# Altium PCB 编码器v5.0.PcbDoc
Units mm, origin at the board's own origin, x right, y up, seen from the top; angles counter-clockwise.
Board outline 74.17 x 43.39 mm, 2 copper layers (Top Layer, Bottom Layer); 85 components, 81 nets, 300 pads, 329 vias.
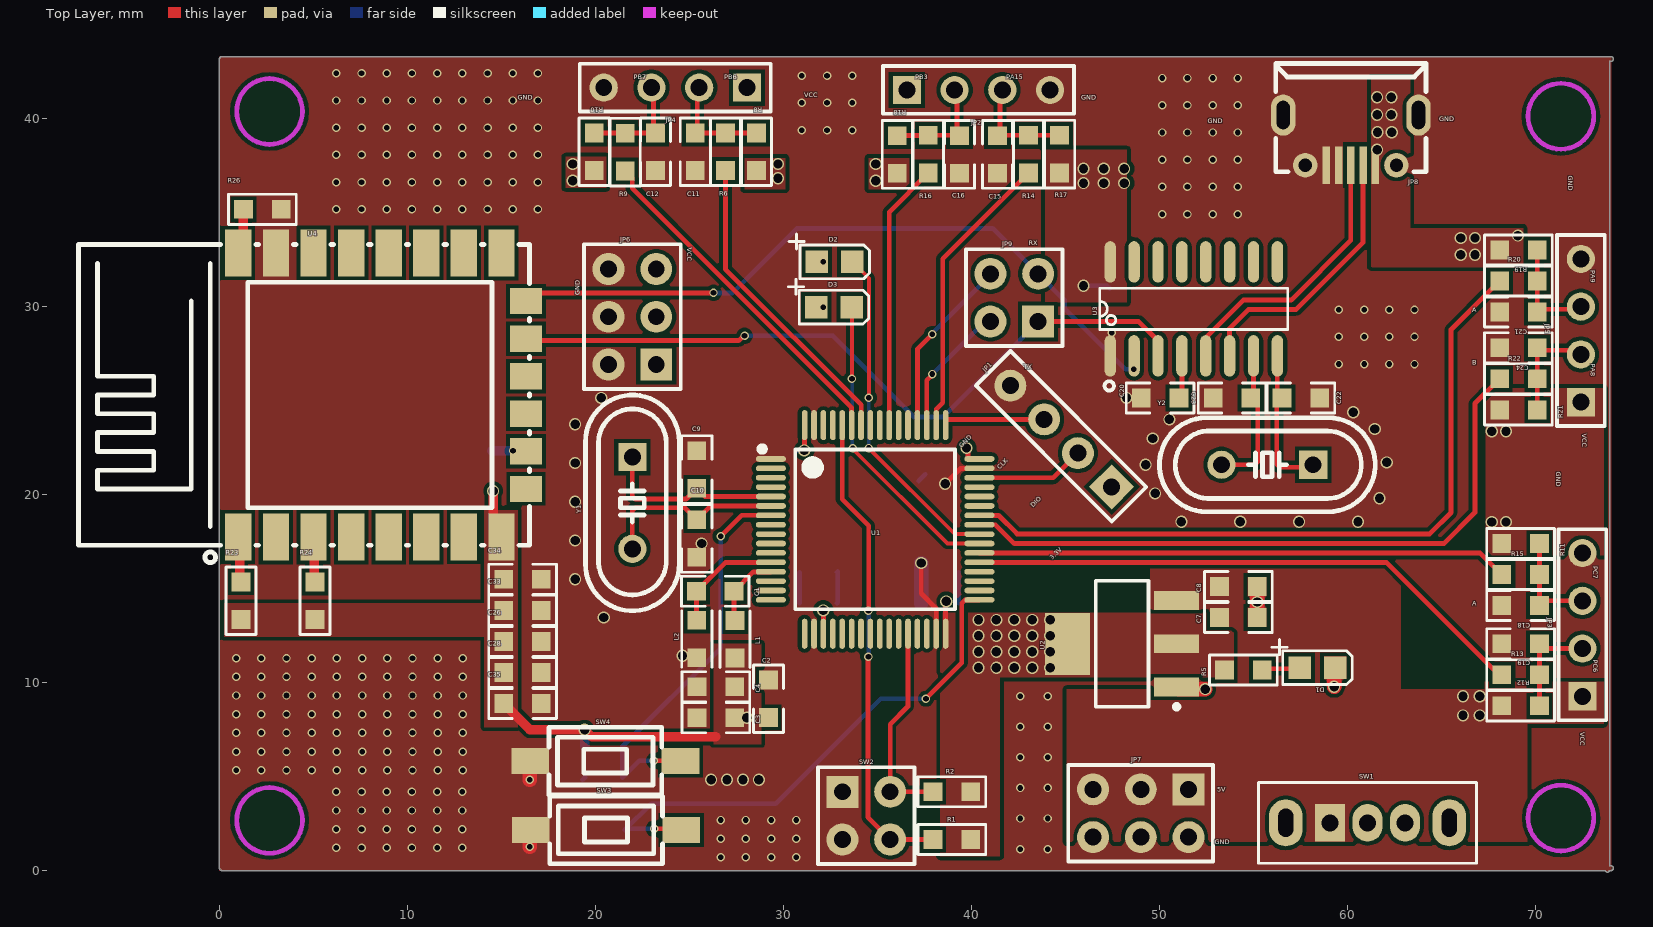
[diagram p0: Top Layer view]
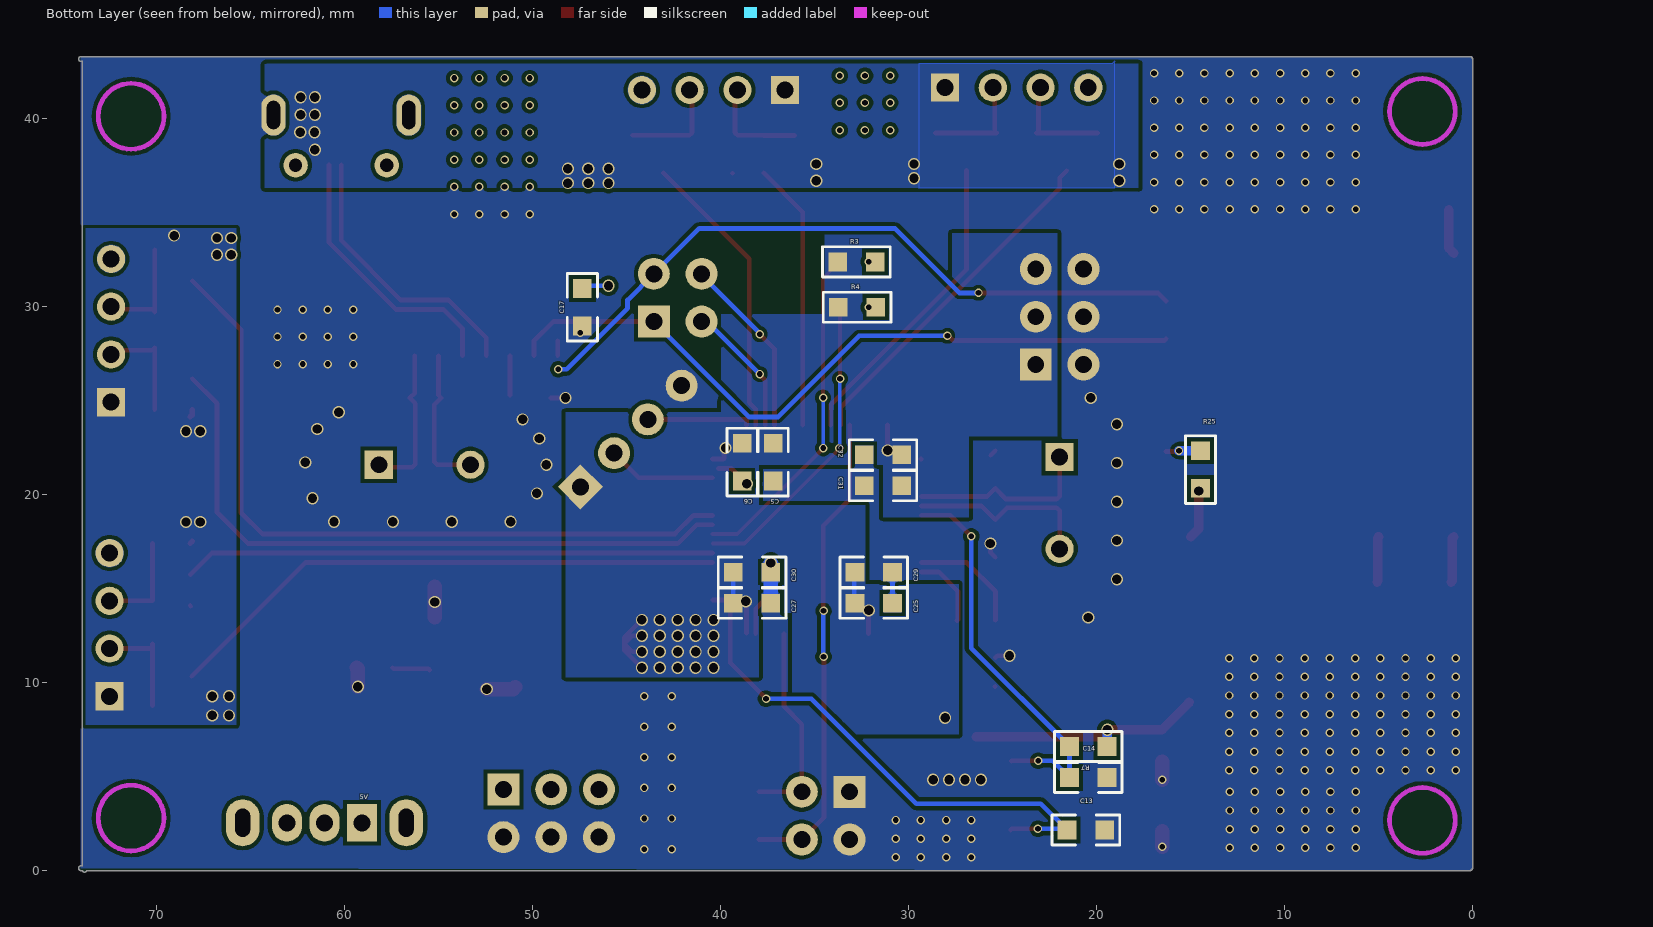
[diagram p1: Bottom Layer view, seen from below]

## Layer stack, top to bottom
Top Solder: solder mask 0.0102, Solder Resist, Dk 3.5
Top Layer: signal copper 0.0356
Dielectric 1: dielectric 0.32, FR-4, Dk 4.8
Bottom Layer: signal copper 0.0356
Bottom Solder: solder mask 0.0102, Solder Resist, Dk 3.5

## Board outline
0,0.127 ccw(c0.127,0.127) 0.127,0 73.728,0 ccw(c73.848,0.043) 73.968,0 74.041,0 ccw(c74.041,0.127) 74.168,0.127 ccw(c74.041,0.127) 74.041,0.255 73.975,0.255 73.975,43.053 74.041,43.053 ccw(c74.041,43.18) 74.168,43.18 ccw(c74.041,43.18) 74.041,43.308 0.127,43.308 ccw(c0.127,43.18) 0,43.18

## Design rules (kind name [scope] priority, off if disabled: settings)
Clearance Clearance_2 [InNetClass('PWR')] p1: gap=0.203 ignorepadtopadclearanceinfootprint=TRUE
Clearance Clearance_1 [InNetClass('GND')] p2: gap=0.203 ignorepadtopadclearanceinfootprint=TRUE
Clearance Clearance_3 [InNetClass('SIGNAL')] p3: gap=0.203 ignorepadtopadclearanceinfootprint=TRUE
Clearance [All] p4: gap=0.203 ignorepadtopadclearanceinfootprint=TRUE
DiffPairsRouting [All] p1: maxlimit=0.3 minlimit=0.203 mostfreqgap=0.254 toplayer_minwidth=0.203 toplayer_maxwidth=0.254 toplayer_prefwidth=0.254 bottomlayer_minwidth=0.203 bottomlayer_maxwidth=0.254 bottomlayer_prefwidth=0.254 maxuncoupledlength=12.7
PolygonConnect [All] p1: connectstyle=Direct reliefconductorwidth=0.254 reliefentries=4 polygonreliefangle="90 Angle" airgapwidth=0.254
RoutingVias [All] p1: holewidth=0.711 width=1.27 viastyle="Through Hole" minholewidth=0.711 minwidth=1.27 maxholewidth=0.711 maxwidth=1.27
SolderMaskExpansion [All] p1: expansion=0.102 istentingtop=FALSE
Width [All] p1: maxlimit=2.54 minlimit=0.203 preferedwidth=0.254
29 further rules are at their usual default settings.

## Classes and differential pairs
net class SIGNAL: BOOT0 BOOT1 CH340_D+ CH340_D- NetC9_1 NetC10_1 NetC11_2 NetC12_2 NetC15_2 NetC16_1 NetC18_1 NetC19_1 NetC20_1 NetC21_1 NetC22_1 NetC23_1 NetC24_1 NetD1_1 NetD2_1 NetD3_1 NetF1_2 NetR23_2 NetR24_2 NetR25_1 NetR26_1 PA0 PA1 PA2 PA3 PA4 PA5 PA6 PA7 PA8 PA9 PA10 PA11 PA12 PA15 PB0 PB1 PB3 PB4 PB5 PB6 PB7 PB8 PB9 PB10 PB11 PB12 PB13 PB14 PB15 PC0 PC1 PC2 PC3 PC4 PC5 PC6 PC7 PC8 PC9 PC10 PC11 PC12 PC13 PC14 PC15 PD2 RESET RX SWCLK SWDIO TX VDDA VSSA
net class GND: GND
net class PWR: 3.3V 5V

## Components (designator, comment, footprint, x,y, rotation, side; value= is the part's Value field where it differs from the comment)
C1 "0805c" 0805C 26.384,14.859 r180 top
C2 "0805c" 0805C 29.21,9.144 r90 top
C3 "0805c" 0805C 26.416,8.128 r180 top
C4 "0805c" 0805C 26.416,9.779 r180 top
C5 "0805c" 0805C 37.211,21.733 r90 bottom
C6 "0805c" 0805C 38.862,21.733 r90 bottom
C7 "0805c" 0805C 54.213,13.462 r0 top
C8 "0805c" 0805C 54.213,15.113 r0 top
C9 "22pF" 0805C 25.4,21.336 r90 top
C10 "22pF" 0805C 25.4,17.669 r270 top
C11 "10nF" 0805C 25.315,38.243 r90 top
C12 "10nF" 0805C 23.199,38.243 r90 top
C13 "0805c" 0805C 20.574,2.159 r180 bottom
C14 "0805c" 0805C 20.447,4.953 r180 bottom
C15 "10nF" 0805C 41.402,38.1 r90 top
C16 "10nF" 0805C 39.37,38.1 r270 top
C17 "0805c" 0805C 47.366,29.972 r90 bottom
C18 "10nF (103) 10% 50V" 0805C 69.231,14.097 r180 top
C19 "10nF (103) 10% 50V" 0805C 69.231,12.065 r180 top
C20 "0805c" 0805C 50.049,25.146 r180 top
C21 "10nF" 0805C 69.115,29.718 r180 top
C22 "0805c" 0805C 57.542,25.146 r0 top
C23 "0805c" 0805C 53.875,25.146 r180 top
C24 "10nF" 0805C 69.115,27.813 r180 top
C25 "0805c" 0805C 31.861,14.224 r0 bottom
C26 "0805c" 0805C 16.129,12.192 r0 top
C27 "0805c" 0805C 38.338,14.224 r0 bottom
C28 "0805c" 0805C 16.129,10.541 r0 top
C29 "0805c" 0805C 31.861,15.875 r0 bottom
C30 "0805c" 0805C 38.338,15.875 r0 bottom
C31 "0805c" 0805C 31.369,20.474 r180 bottom
C32 "0805c" 0805C 31.369,22.125 r180 bottom
C33 "0805c" 0805C 16.129,13.843 r0 top
C34 "10uF (106) 10% 25V" 0805C 16.129,15.494 r180 top
C35 "100nF(104) 10% 50V" 0805C 16.129,8.89 r180 top
D1 "LED" 0805D 58.42,10.795 r0 top
D2 "LED" 0805D 32.732,32.385 r0 top
D3 "LED" 0805D 32.7,29.972 r0 top
JP1 "SWD" SWD 44.779,23.105 r135 top
JP2 "PIN4" HDR1X4 36.576,41.529 r0 top
JP3 "PIN4" HDR1X4 72.517,9.271 r90 top
JP4 "PIN4" HDR1X4 28.067,41.656 r180 top
JP5 "PIN4" HDR1X4 72.436,24.919 r90 top
JP6 "PWR3.3V" PWR 23.241,26.924 r90 top
JP7 "PWR5V" PWR 51.562,4.318 r180 top
JP8 "microusb" MICRO-USB-SMD_MICROXNJ 60.198,38.862 r180 top
JP9 "2*2" CON20VP2R54-2X2TM 42.291,30.48 r90 top
L1 "0805L" 0805L 27.432,12.303 r90 top
L2 "0805L" 0805L 25.4,12.319 r90 top
R1 "0805r" 0805R 38.973,1.651 r180 top
R2 "0805r" 0805R 38.973,4.191 r180 top
R3 "0805r" 0805R 32.782,32.385 r180 bottom
R4 "0805r" 0805R 32.75,29.972 r180 bottom
R5 "0805r" 0805R 54.483,10.668 r180 top
R6 "10KΩ" 0805R 26.924,38.243 r270 top
R7 "0805r" 0805R 20.447,6.604 r180 bottom
R8 "10KΩ" 0805R 28.575,38.243 r90 top
R9 "10KΩ" 0805R 21.59,38.227 r270 top
R10 "10KΩ" 0805R 19.939,38.243 r90 top
R11 "10KΩ" 0805R 69.231,17.399 r0 top
R12 "10KΩ" 0805R 69.231,8.763 r180 top
R13 "10KΩ" 0805R 69.231,10.414 r0 top
R14 "10KΩ" 0805R 43.053,38.116 r270 top
R15 "10KΩ" 0805R 69.231,15.748 r0 top
R16 "10KΩ" 0805R 37.719,38.116 r270 top
R17 "10KΩ" 0805R 44.704,38.116 r270 top
R18 "10KΩ" 0805R 36.068,38.1 r90 top
R19 "10KΩ" 0805R 69.115,33.02 r0 top
R20 "10KΩ" 0805R 69.115,31.369 r180 top
R21 "10KΩ" 0805R 69.115,24.511 r0 top
R22 "10KΩ" 0805R 69.115,26.162 r180 top
R23 "0805r" 0805R 1.143,14.351 r90 top
R24 "0805r" 0805R 5.08,14.351 r90 top
R25 "0805r" 0805R 14.478,21.336 r270 bottom
R26 "0805r" 0805R 2.286,35.179 r0 top
SW1 "SWTICH_3P" SWITCH_3P 59.087,2.54 r0 top
SW2 "SW_BOOT" CON20VP2R54-2X2TM 34.417,2.921 r270 top
SW3 "KEY" SW-SMD_L6.1-W3.6-LS8.0 20.574,2.159 r180 top
SW4 "KEY" SW-SMD_L6.1-W3.6-LS8.0 20.532,5.823 r180 top
U1 "STM32F103RCT6" PCBComponent_1 30.648,22.34 r270 top
U2 "ASM1117-3.3" SOT223_N 48.027,12.065 r180 top
U3 "CH340G" SOP16 51.843,29.885 r0 top
U4 "" WIFIM-SMD_ESP-12F-ESP8266MOD 8.658,25.303 r0 top
Y1 "8MHz" HC-49US_L11.5-W4.5-P4.88 21.971,19.558 r270 top
Y2 "12MHz" HC-49US_L11.5-W4.5-P4.88 55.753,21.59 r180 top

## Footprints (in the part's own frame and the unit in brackets; to place one, negate y for a bottom-side part, rotate by r counter-clockwise, add the part's x,y. Pads: shape width x height; smd on the part's side, far side on the other; paste and mask are expansions set on the pad)
0805C [mm]
  rect 1x1 smd: 1(-1,0) 2(1,0)
  silkscreen extent -1.8,-0.8 1.8,0.8
0805D [mm]
  rect 1.2x1.2 smd: 1(-0.95,0) 2(0.95,0)
  silkscreen extent -2.42,-0.9 1.85,1.49
0805L [mm]
  rect 1x1 smd: 1(-1,0) 2(1,0)
  silkscreen extent -1.5,-0.8 1.5,0.8
0805R [mm]
  rect 1x1 smd: 1(-1,0) 2(1,0)
  silkscreen extent -1.8,-0.8 1.8,0.8
CON20VP2R54-2X2TM [mm]
  rect 1.7x1.7 hole 0.9: 1(-1.27,-1.27)
  round 1.7 hole 0.9: 2(-1.27,1.27) 3(1.27,-1.27) 4(1.27,1.27)
  silkscreen extent -2.57,-2.57 2.57,2.57
HC-49US_L11.5-W4.5-P4.88 [mm]
  rect 1.5x1.5 hole 0.9: 1(-2.44,0)
  round 1.5 hole 0.9: 2(2.44,0)
  silkscreen extent -5.74,-2.5 5.74,2.5
HDR1X4 [mm] "Connector; Header; 4 Position"
  rect 1.5x1.5 hole 0.9: 1(0,0)
  round 1.5 hole 0.9: 2(2.54,0) 3(5.08,0) 4(7.62,0)
  silkscreen extent -1.27,-1.27 8.89,1.27
MICRO-USB-SMD_MICROXNJ [mm]
  rect 0.4x2 smd: 1(-1.3,1.327) 2(-0.65,1.327) 3(0,1.327) 4(0.65,1.327) 5(1.3,1.327)
  round 1.3 hole 0.7: 6(2.425,1.335) 9(-2.425,1.335)
  oval 1.3x2.2 hole 0.7 slot 1.5 at 90 deg: 7(3.6,-1.335) 8(-3.6,-1.335)
  silkscreen extent -4,-4.07 4,1.68
PCBComponent_1 [mm]
  oval 0.3x1.6 smd: 1(0.441,-1.311) 2(0.941,-1.311) 3(1.441,-1.311) 4(1.941,-1.311) 5(2.441,-1.311) 6(2.941,-1.311) 7(3.441,-1.311) 8(3.941,-1.311) 9(4.441,-1.311) 10(4.941,-1.311) 11(5.441,-1.311) 12(5.941,-1.311) 13(6.441,-1.311) 14(6.941,-1.311) 15(7.441,-1.311) 16(7.941,-1.311) 33(7.941,9.789) 34(7.441,9.789) 35(6.941,9.789) 36(6.441,9.789) 37(5.941,9.789) 38(5.441,9.789) 39(4.941,9.789) 40(4.441,9.789) 41(3.941,9.789) 42(3.441,9.789) 43(2.941,9.789) 44(2.441,9.789) 45(1.941,9.789) 46(1.441,9.789) 47(0.941,9.789) 48(0.441,9.789)
  oval 1.6x0.3 smd: 17(9.741,0.489) 18(9.741,0.989) 19(9.741,1.489) 20(9.741,1.989) 21(9.741,2.489) 22(9.741,2.989) 23(9.741,3.489) 24(9.741,3.989) 25(9.741,4.489) 26(9.741,4.989) 27(9.741,5.489) 28(9.741,5.989) 29(9.741,6.489) 30(9.741,6.989) 31(9.741,7.489) 32(9.741,7.989) 49(-1.359,7.989) 50(-1.359,7.489) 51(-1.359,6.989) 52(-1.359,6.489) 53(-1.359,5.989) 54(-1.359,5.489) 55(-1.359,4.989) 56(-1.359,4.489) 57(-1.359,3.989) 58(-1.359,3.489) 59(-1.359,2.989) 60(-1.359,2.489) 61(-1.359,1.989) 62(-1.359,1.489) 63(-1.359,0.989) 64(-1.359,0.489)
  silkscreen extent -0.24,-1.92 8.44,8.49
PWR [mm]
  rect 1.7x1.7 hole 0.9: 1(0,0)
  round 1.7 hole 0.9: 2(0,2.54) 3(2.54,0) 4(2.54,2.54) 5(5.08,0) 6(5.08,2.54)
  silkscreen extent -1.3,-1.3 6.4,3.84
SOP16 [mm]
  oval 0.6x2.2 smd: 1(-4.445,-2.5) 2(-3.175,-2.5) 3(-1.905,-2.5) 4(-0.635,-2.5) 5(0.635,-2.5) 6(1.905,-2.5) 7(3.175,-2.5) 8(4.445,-2.5) 9(4.445,2.5) 10(3.175,2.5) 11(1.905,2.5) 12(0.635,2.5) 13(-0.635,2.5) 14(-1.905,2.5) 15(-3.175,2.5) 16(-4.445,2.5)
  silkscreen extent -5,-4.35 5,1.1
SOT223_N [mm] "SOT223, 4-Leads, Body 6.5x3.5mm, Pitch 2.3mm, Lead Span 7mm, IPC Medium Density"
  rect 2.4x1 smd: 1(-2.9,2.3) 2(-2.9,0) 3(-2.9,-2.3)
  rect 2.4x3.3 smd: 4(2.9,0)
  silkscreen extent -3.03,-3.35 1.4,3.47, body extent -1.85,-3.35 1.85,3.35, height 1.7
SW-SMD_L6.1-W3.6-LS8.0 [mm]
  rect 2x1.38 smd: 1(-4,0) 2(4,0)
  silkscreen extent -3,-1.8 3,1.8
SWD [mm]
  rect 1.7x1.7 hole 0.9: 1(-3.81,0)
  round 1.7 hole 0.9: 2(-1.27,0) 3(1.27,0) 4(3.81,0)
  silkscreen extent -5.11,-1.3 5.11,1.3
SWITCH_3P [mm]
  rect 1.6x2 hole 0.9: 1(0,0)
  oval 1.6x2 hole 0.9: 2(2,0) 3(4,0)
  oval 1.8x2.5 hole 1.5 slot 0.8 at 0 deg: 4(-2.35,0) 4(6.35,0)
  silkscreen extent -3.8,-2.15 7.8,2.15
WIFIM-SMD_ESP-12F-ESP8266MOD [mm]
  rect 1.4x2.5 smd: 1(-7.651,-7.551) 2(-5.651,-7.551) 3(-3.651,-7.551) 4(-1.651,-7.551) 5(0.349,-7.551) 6(2.349,-7.551) 7(4.349,-7.551) 8(6.349,-7.551) 9(6.349,7.549) 10(4.349,7.55) 11(2.349,7.551) 12(0.349,7.551) 13(-1.651,7.55) 14(-3.651,7.551) 15(-5.651,7.55) 16(-7.651,7.551)
  rect 1.7x1.4 smd: 17(7.65,-5) 18(7.649,-3.002) 19(7.649,-1.003) 20(7.649,0.998) 21(7.649,2.997) 22(7.65,4.997)
  silkscreen extent -16.15,-8.92 7.85,8

## Part data
C9 C10: library part "0805 22pF (220) 5% 50V", "贴片电容", Package=0805, SuppliersPartNumber=C1804, ComponentLink1Description=供应商链接, ComponentLink1URL=http://www.szlcsc.com/product/details_2156.html, Supplier=LC
C11 C12 C15 C16 C18 C19 C21 C24: library part "0805 10nF (103) 10% 50V", "贴片电容", Package=0805, SuppliersPartNumber=C1710, ComponentLink1Description=供应商链接, ComponentLink1URL=http://www.szlcsc.com/product/details_2062.html, Supplier=LC
C34: library part "0805 10uF (106) 10% 25V", "贴片电容", Package=0805, SuppliersPartNumber=C15850, ComponentLink1Description=供应商链接, ComponentLink1URL=http://www.szlcsc.com/product/details_16532.html, Supplier=LC
C35: library part "0805 100nF(104) 10% 50V", "贴片电容", Package=0805, SuppliersPartNumber=C49678, ComponentLink1Description=供应商链接, ComponentLink1URL=http://www.szlcsc.com/product/details_50686.html, Supplier=LC
JP8: library part miniusb
R6 R8 R9 R10 R11 R12 R13 R14 R15 R16 R17 R18 R19 R20 R21 R22: library part "0805 10KΩ (1002) 1%", "贴片电阻", Package=0805, SuppliersPartNumber=C17414, ComponentLink1Description=供应商链接, ComponentLink1URL=http://www.szlcsc.com/product/details_18102.html, Supplier=LC
SW3 SW4: library part KEY_4P
U1: "ARM Cortex-M3 32-bit MCU, 256 KB Flash, 48 KB Internal RAM, 51 I/Os, 64-pin LQFP, -40 to 85 degC, Tray", I/Os (High Current)=51, Operating Frequency(F) (Processor speed) (MHz)=72, Supplier Part Number 1=497-9033-ND, Supply Voltage(Vcc) min (V)=2, A/D Converter="3x12-bit (16 Channel)", ComponentLink1Description="Manufacturer URL", ComponentLink1URL=http://www.st.com/web/en/home.html, ComponentLink2Description=Datasheet, ComponentLink2URL=http://www.st.com/st-web-ui/static/active/en/resource/technical/document/datasheet/CD00191185.pdf, ComponentLink3Description="Package Specification", ComponentLink3URL=http://www.st.com/st-web-ui/static/active/en/resource/technical/document/datasheet/DM00037051.pdf, Core="ARM Cortex-M3", D/A Converter="2x12-bit (2 Channel)", DatasheetVersion="Rev. 8", FLASH Size (Prog) (kB)=256, Internal RAM Size (kB)=48, Mounting Technology="Surface Mount", PackageDescription="64-Pin Low Profile Quad Flat Package, 10 x 10 mm Body, 0.5 mm Pitch", PackageReference=LQFP64, PackageVersion="Rev. 4, 06/2013", Packing=Tray, PartNumber=STM32F103RCT6, Supplier 1=Digi-Key, Supplier 2=Newark, Supplier 3=Newark, Supplier 4=Mouser, Supplier Part Number 2=01P4099, Supplier Part Number 3=57P1227, Supplier Part Number 4=511-STM32F103RCT6
U4: library part ESP8266
Y1 Y2: library part "SMD-5032_2P 8MHz 20ppm 20pF", "贴片晶振", Package=SMD-5032_2P, SuppliersPartNumber=C115962, ComponentLink1Description=供应商链接, ComponentLink1URL=http://www.szlcsc.com/product/details_117214.html, Supplier=LC

## Via types
v1: diameter 0.45, hole 0.3, Top Layer to Bottom Layer, 238 vias
v2: diameter 0.65, hole 0.5, Top Layer to Bottom Layer, 91 vias

## Nets (pads, with @x,y where several pads share a name; then routed paths per layer and width w, separated by ;. In a path a pad name is that pad's centre, name@x,y a point inside that pad or via, vN(x,y) a via of type N, cw(c..) or ccw(c..) an arc to the next point about the centre after c; other vN are vias at no path point)
3.3V: C2.1 C3.1 C4.1 C5.2 C6.2 C25.2 C26.1 C27.2 C28.1 C29.2 C30.2 C31.2 C32.2 C33.1 C34.2 C35.2 JP1.1 JP6.1 JP6.3 JP6.5 L1.1 R1.1 R2.1 R3.1 R4.1 R5.2 R7.2 R23.1 R24.1 R25.2 U1.19 U1.32 U1.48 U1.64 U2.2 U2.4 U4.8 | length 30.6
  Top Layer w0.254: v2(31.115,22.352) 31.128,22.365 31.128,23.69 U1.64 ; v2(32.131,13.843) 32.134,13.84 32.134,12.602 U1.19 U1.19@32.146,12.608 ; U1.32@38.628,12.621 38.628,14.279 v2(38.67,14.321) ; v2(39.751,22.479) 39.827,22.403 39.827,21.921 39.848,21.899 U1.48 ; v2(44.196,10.795) 45.127,11.726 U2.4 ; v2(44.196,11.642) 44.703,11.642 U2.4 ; v2(44.196,12.488) 44.704,12.488 U2.4 ; v2(44.196,13.335) 45.127,12.404 U2.4
  Top Layer w0.508: v2(14.561,20.193) 14.561,18.198 U4.8 ; C35.2@15.068,8.951 C35.2 16.526,7.493 v2(19.431,7.493) 19.812,7.112 26.4,7.112
  Bottom Layer w0.254: R25.2 14.561,20.253 v2(14.561,20.193) ; R7.2@19.431,6.62 R7.2 ; C32.2@30.742,22.352 v2(31.115,22.352) ; C25.2 32.893,14.256 32.893,15.907 C29.2 ; v2(38.67,14.321) v2@38.67,14.334 ; C27.2 C30.2
  Bottom Layer w0.508: R7.2@19.431,6.62 v2(19.431,7.493)
  other v2: 28.067,8.128 40.386,10.795 41.338,10.795 42.291,10.795 43.243,10.795 40.386,11.642 41.338,11.642 42.291,11.642 43.243,11.642 40.386,12.488 41.338,12.488 42.291,12.488 43.243,12.488 40.386,13.335 41.338,13.335 42.291,13.335 43.243,13.335
5V: C7.1 C8.1 C17.2 JP2.1 JP3.1 JP4.1 JP5.1 JP7.1 JP7.3 JP7.5 JP8.1 R8.1 R10.1 R11.1 R12.2 R17.2 R18.1 R19.1 R21.1 SW1.1 U2.3 U3.16 | length 2.4
  Top Layer w0.254: v2@61.49,39.094 v2@61.494,39.09 ; v2(67.056,9.271) 67.163,9.271 v2@67.298,9.136
  Top Layer w0.279: R11.1@68.115,17.515 R11.1 ; R21.1 68.115,24.214 68.168,24.214 R21.1@68.231,24.151
  Bottom Layer w0.254: v2(45.974,31.115) 47.223,31.115 C17.2
  other v2: 66.167,8.255 67.056,8.255 66.167,9.271 67.691,18.542 68.453,18.542 67.691,23.368 68.453,23.368 66.04,32.766 66.802,32.766 66.04,33.655 66.802,33.655 69.088,33.782 45.974,36.576 47.053,36.576 48.133,36.576 18.796,36.703 34.925,36.703 29.718,36.83 45.974,37.338 47.053,37.338 48.133,37.338 18.796,37.592 29.718,37.592 34.925,37.592 61.595,38.354 61.617,39.286 62.379,39.286 61.595,40.217 62.357,40.217 61.595,41.148 62.357,41.148
BOOT0: R1.2 SW2.4 U1.60 | length 25.4
  Top Layer w0.254: U1.60 33.137,19.75 34.544,18.343 34.544,13.833 v1(34.533,13.822) ; v1(34.533,11.381) 34.507,11.354 34.507,2.831 SW2.4 R1.2
  Bottom Layer w0.254: v1(34.533,11.381) 34.544,11.391 34.544,13.811 v1@34.555,13.822
BOOT1: R2.2 SW2.2 U1.28 | length 11.1
  Top Layer w0.254: U1.28 36.637,8.735 35.687,7.785 SW2.2 R2.2
CH340_D+: JP8.3 U3.5 | length 14.8
  Top Layer w0.254: U3.5 52.478,28.348 54.483,30.353 57.023,30.353 60.198,33.528 JP8.3
CH340_D-: JP8.2 U3.6 | length 14.6
  Top Layer w0.254: U3.6 53.748,28.856 54.737,29.845 57.277,29.845 60.848,33.416 JP8.2
GND: C2.2 C3.2 C4.2 C5.1 C6.1 C7.2 C8.2 C9.2 C10.2 C11.1 C12.1 C13.2 C14.2 C15.1 C16.2 C17.1 C18.2 C19.2 C20.2 C21.2 C22.2 C23.2 C24.2 C25.1 C26.2 C27.1 C28.2 C29.1 C30.1 C31.1 C32.1 C33.2 C34.1 C35.1 D1.2 JP1.4 JP2.4 JP3.4 JP4.4 JP5.4 JP6.2 JP6.4 JP6.6 JP7.2 JP7.4 JP7.6 JP8.4 JP8.5 JP8.6 JP8.7 JP8.8 JP8.9 L2.1 R26.2 SW2.1 SW2.3 SW3.2 SW4.2 U1.1 U1.18 U1.31 U1.47 U1.63 U2.1 U3.1 U4.15 | length 21
  Top Layer w0.254: SW3.2@16.51,2.095 SW3.2 ; v2(24.638,11.43) 25.289,11.43 L2.1 ; C4.2@25.4,9.795 C4.2 ; C10.2 25.654,16.923 v2(25.654,17.399) ; C9.2 C9.2@25.638,22.098 ; U1.1 U1.1@29.346,21.891 ; SW2.1@32.512,4.826 SW2.1 ; v2(37.338,16.363) 37.338,14.74 38.137,13.941 U1.31 ; v2(38.608,20.574) 39.424,21.39 40.116,21.39 U1.47@40.121,21.395 ; v2(48.26,25.146) C20.2 ; C18.2@68.199,14.065 C18.2
  Top Layer w0.762: v1(16.51,1.27) SW3.2@16.51,2.095 ; v1(16.51,4.826) SW4.2@16.51,5.802 ; U2.1 51.04,9.652 v2(52.451,9.652) ; C7.2 v2(55.213,14.288) C8.2 ; v2(59.309,9.779) 59.309,10.734 D1.2
  Bottom Layer w0.254: C14.2@19.32,4.826 C14.2 ; JP4.4 JP4.4@20.715,41.656 ; C25.1 C29.1 ; C5.1 C5.1@37.56,21.082 ; JP1.4@42.085,25.408 JP1.4
  Bottom Layer w0.762: C27.1 v2(37.338,16.363)
  other v1: 26.67,0.699 28.011,0.699 29.351,0.699 30.692,0.699 42.601,1.143 44.069,1.143 6.223,1.207 7.564,1.207 8.904,1.207 10.245,1.207 11.585,1.207 12.926,1.207 26.67,1.693 28.011,1.693 29.351,1.693 30.692,1.693 6.223,2.201 7.564,2.201 8.904,2.201 10.245,2.201 11.585,2.201 12.926,2.201 26.67,2.688 28.011,2.688 29.351,2.688 30.692,2.688 42.601,2.769 44.069,2.769 6.223,3.196 7.564,3.196 8.904,3.196 10.245,3.196 11.585,3.196 12.926,3.196 6.223,4.191 7.564,4.191 8.904,4.191 10.245,4.191 11.585,4.191 12.926,4.191 42.601,4.394 44.069,4.394 0.889,5.334 2.23,5.334 3.57,5.334 4.911,5.334 6.251,5.334 7.592,5.334 8.932,5.334 10.273,5.334 11.613,5.334 12.954,5.334 42.601,6.02 44.069,6.02 0.889,6.329 2.23,6.329 3.57,6.329 4.911,6.329 6.251,6.329 7.592,6.329 8.932,6.329 10.273,6.329 11.613,6.329 12.954,6.329 0.889,7.324 2.23,7.324 3.57,7.324 4.911,7.324 6.251,7.324 7.592,7.324 8.932,7.324 10.273,7.324 11.613,7.324 12.954,7.324 42.601,7.645 44.069,7.645 0.889,8.318 2.23,8.318 3.57,8.318 4.911,8.318 6.251,8.318 7.592,8.318 8.932,8.318 10.273,8.318 11.613,8.318 12.954,8.318 42.601,9.271 44.069,9.271 0.889,9.313 2.23,9.313 3.57,9.313 4.911,9.313 6.251,9.313 7.592,9.313 8.932,9.313 10.273,9.313 11.613,9.313 12.954,9.313 0.889,10.308 2.23,10.308 3.57,10.308 4.911,10.308 6.251,10.308 7.592,10.308 8.932,10.308 10.273,10.308 11.613,10.308 12.954,10.308 0.889,11.303 2.23,11.303 3.57,11.303 4.911,11.303 6.251,11.303 7.592,11.303 8.932,11.303 10.273,11.303 11.613,11.303 12.954,11.303 59.563,26.949 60.904,26.949 62.244,26.949 63.585,26.949 59.563,28.397 60.904,28.397 62.244,28.397 63.585,28.397 47.475,28.606 59.563,29.845 60.904,29.845 62.244,29.845 63.585,29.845 50.165,34.925 51.506,34.925 52.846,34.925 54.187,34.925 6.223,35.179 7.564,35.179 8.904,35.179 10.245,35.179 11.585,35.179 12.926,35.179 14.266,35.179 15.607,35.179 16.947,35.179 50.165,36.373 51.506,36.373 52.846,36.373 54.187,36.373 6.223,36.627 7.564,36.627 8.904,36.627 10.245,36.627 11.585,36.627 12.926,36.627 14.266,36.627 15.607,36.627 16.947,36.627 50.165,37.821 51.506,37.821 52.846,37.821 54.187,37.821 6.223,38.075 7.564,38.075 8.904,38.075 10.245,38.075 11.585,38.075 12.926,38.075 14.266,38.075 15.607,38.075 16.947,38.075 50.165,39.268 51.506,39.268 52.846,39.268 54.187,39.268 30.988,39.395 32.329,39.395 33.669,39.395 6.223,39.522 7.564,39.522 8.904,39.522 10.245,39.522 11.585,39.522 12.926,39.522 14.266,39.522 15.607,39.522 16.947,39.522 50.165,40.716 51.506,40.716 52.846,40.716 54.187,40.716 30.988,40.843 32.329,40.843 33.669,40.843 6.223,40.97 7.564,40.97 8.904,40.97 10.245,40.97 11.585,40.97 12.926,40.97 14.266,40.97 15.607,40.97 16.947,40.97 50.165,42.164 51.506,42.164 52.846,42.164 54.187,42.164 30.988,42.291 32.329,42.291 33.669,42.291 6.223,42.418 7.564,42.418 8.904,42.418 10.245,42.418 11.585,42.418 12.926,42.418 14.266,42.418 15.607,42.418 16.947,42.418
  other v2: 26.162,4.826 27.009,4.826 27.855,4.826 28.702,4.826 20.447,13.462 18.923,15.494 18.923,17.558 51.181,18.562 54.314,18.562 57.446,18.562 60.579,18.562 18.923,19.622 61.722,19.812 49.784,20.066 49.276,21.59 18.923,21.685 62.103,21.717 49.657,22.987 61.468,23.495 18.923,23.749 50.546,24.003 60.325,24.384 20.32,25.146
NetC9_1: C9.1 U1.5 Y1.1 | length 9.9
  Top Layer w0.254: Y1.1 21.971,19.91 22.12,19.761 24.825,19.761 C9.1 25.837,19.899 U1.5
NetC10_1: C10.1 U1.6 Y1.2 | length 10
  Top Layer w0.254: Y1.2 21.971,19.155 22.12,19.304 24.765,19.304 C10.1 26.13,19.399 U1.6
NetC11_2: C11.2 JP4.2 R6.1 R8.2 | length 5.6
  Top Layer w0.254: C11.2 R8.2 ; C11.2@25.421,39.349 25.421,41.55 JP4.2
NetC12_2: C12.2 JP4.3 R9.1 R10.2 | length 5.6
  Top Layer w0.254: R10.2 21.59,39.243 23.093,39.243 C12.2 ; JP4.3 23.093,41.55 C12.2@23.093,39.349
NetC15_2: C15.2 JP2.3 R14.1 R17.1 | length 5.6
  Top Layer w0.254: JP2.3 41.529,41.402 41.529,39.265 41.678,39.116 R14.1 R17.1
NetC16_1: C16.1 JP2.2 R16.1 R18.2 | length 5.5
  Top Layer w0.254: R18.2@36.076,39.108 R16.1@37.719,39.108 ; R16.1 39.094,39.116 39.243,39.265 39.243,41.402 JP2.2
NetC18_1: C18.1 JP3.3 R11.2 R15.2 | length 5.3
  Top Layer w0.254: R11.2 R15.2 70.231,14.351 JP3.3
NetC19_1: C19.1 JP3.2 R12.1 R13.2 | length 5.8
  Top Layer w0.254: R12.1 R13.2 C19.1@70.231,11.811 ; C19.1 C19.1@70.231,11.811 ; JP3.2@72.39,11.684 JP3.2 C19.1@70.231,11.811
NetC20_1: C20.1 U3.4 | length 2.1
  Top Layer w0.254: C20.1@51.208,25.305 U3.4
NetC21_1: C21.1 JP5.3 R19.2 R20.1 | length 5.7
  Top Layer w0.254: R19.2 R20.1 C21.1 70.255,29.859 72.295,29.859 JP5.3
NetC22_1: C22.1 U3.8 Y2.1 | length 7.9
  Top Layer w0.254: U3.8 56.288,25.4 C22.1 56.261,24.865 56.261,21.612 56.41,21.463 Y2.1@58.093,21.463
NetC23_1: C23.1 U3.7 Y2.2 | length 7.6
  Top Layer w0.254: Y2.2@53.34,21.59 55.096,21.59 55.245,21.739 55.245,24.776 C23.1 ; C23.1@55.018,25.289 U3.7
NetC24_1: C24.1 JP5.2 R21.2 R22.1 | length 5.7
  Top Layer w0.254: R21.2 R22.1 C24.1 70.242,27.686 JP5.2@72.209,27.686 ; JP5.2@72.165,27.459 JP5.2
NetD1_1: D1.1 R5.1 | length 2
  Top Layer w0.254: R5.1 55.546,10.732 57.406,10.732 D1.1
NetD2_1: D2.1 R3.2
  other v1: 32.131,32.385
NetD3_1: D3.1 R4.2
  other v1: 32.131,29.972
NetF1_2: SW1.2
NetR23_2: R23.2 U4.1 | length 2.5
  Top Layer w0.508: U4.1 1.075,17.684 1.075,15.419 R23.2
NetR24_2: R24.2 U4.3 | length 2.4
  Top Layer w0.508: U4.3 5.044,17.715 5.044,15.388 R24.2
NetR25_1: R25.1 U4.18 | length 1.8
  Top Layer w0.254: v1(15.621,22.336) 15.656,22.301 U4.18
  Bottom Layer w0.508: R25.1 v1(15.621,22.336)
NetR26_1: R26.1 U4.16 | length 2.4
  Top Layer w0.508: U4.16 1.27,33.117 R26.1@1.27,35.163
PA0: U1.14
PA1: U1.15
PA2: U1.16
PA3: U1.17
PA4: U1.20
PA5: U1.21
PA6: U1.22
PA7: U1.23
PA8: R22.2 U1.41 | length 35.1
  Top Layer w0.254: U1.41 40.441,18.395 41.288,18.395 42.284,17.399 65.151,17.399 66.802,19.05 66.802,24.849 R22.2
PA9: R20.2 U1.42 | length 39.4
  Top Layer w0.254: U1.42@40.437,18.891 41.457,18.891 42.441,17.907 64.389,17.907 65.532,19.05 65.532,28.786 67.742,30.996 R20.2
PA10: U1.43
PA11: U1.44
PA12: U1.45
PA15: R14.2 U1.50 | length 15.5
  Top Layer w0.254: U1.50 38.141,23.703 38.141,24.368 38.144,24.371 38.144,24.553 38.481,24.89 38.481,32.544 R14.2
PB0: U1.26
PB1: U1.27
PB3: R16.2 U1.55 | length 14.3
  Top Layer w0.254: U1.55 35.637,35.034 R16.2
PB4: U1.56
PB5: U1.57
PB6: R6.2 U1.58 | length 16.5
  Top Layer w0.254: R6.2 26.924,31.996 34.146,24.774 U1.58@34.146,23.708
PB7: R9.2 U1.59 | length 18.5
  Top Layer w0.254: R9.2 21.963,36.854 21.963,36.311 33.628,24.645 U1.59@33.628,23.708
PB8: U1.61
PB9: U1.62
PB10: U1.29
PB11: U1.30
PB12: C13.1 SW3.1 U1.33 | length 28.8
  Top Layer w0.254: v1(23.124,2.223) 24.51,2.223 SW3.1 ; v1(37.592,9.144) 39.497,11.049 39.497,14.227 39.66,14.39 U1.33@40.428,14.39
  Bottom Layer w0.254: v1(23.124,2.223) 21.637,2.223 C13.1 22.971,3.556 29.591,3.556 35.179,9.144 v1(37.592,9.144)
PB13: U1.34
PB14: U1.35
PB15: U1.36
PC0: U1.8
PC1: U1.9
PC2: U1.10
PC3: U1.11
PC4: U1.24
PC5: U1.25
PC6: R13.1 U1.37 | length 30.2
  Top Layer w0.254: U1.37@40.437,16.383 62.103,16.383 R13.1@68.151,10.335
PC7: R15.1 U1.38 | length 28.3
  Top Layer w0.254: U1.38@40.445,16.891 67.088,16.891 R15.1
PC8: D3.2 U1.39 | length 16.4
  Top Layer w0.203: v1@33.65,26.162 D3.2 ; v1(33.692,22.474) 33.692,22.442 38.735,17.399 U1.39@40.415,17.399
  Bottom Layer w0.203: v1(33.655,26.162) 33.674,26.144 33.674,22.492 v1(33.692,22.474)
PC9: D2.2 U1.40 | length 18.1
  Top Layer w0.203: D2.2 34.555,31.512 v1(34.555,25.157) ; v1(34.544,22.478) 39.123,17.899 U1.40
  Bottom Layer w0.203: v1(34.544,22.478) 34.549,22.484 34.549,25.151 v1(34.555,25.157)
PC10: JP9.2 U1.51 | length 7.1
  Top Layer w0.254: U1.51 37.637,26.074 37.926,26.363 v1(37.926,26.416)
  Bottom Layer w0.254: v1(37.926,26.416) 40.72,29.21 JP9.2
PC11: JP9.4 U1.52 | length 9.7
  Top Layer w0.254: U1.52 37.137,27.742 v1(37.926,28.531)
  Bottom Layer w0.254: v1(37.926,28.531) 37.926,28.584 41.021,31.679 JP9.4
PC12: U1.53
PC13: U1.2
PC14: U1.3
PC15: U1.4
PD2: U1.54
RESET: C14.1 R7.1 SW4.1 U1.7 | length 21.6
  Top Layer w0.254: v1(23.114,5.842) 24.513,5.842 SW4.1 ; v1(26.67,17.78) 27.789,18.899 U1.7
  Bottom Layer w0.254: v1(23.114,5.842) 22.336,5.842 C14.1 R7.1 26.67,11.827 v1(26.67,17.78)
RX: JP9.1 U3.3 U4.21 | length 38.9
  Top Layer w0.254: U4.21 16.413,28.194 27.633,28.194 27.887,28.448 v1(27.94,28.448) ; JP9.1 48.913,29.21 49.938,28.185 U3.3
  Bottom Layer w0.254: v1(27.94,28.448) 32.639,28.448 36.957,24.13 38.481,24.13 JP9.1
SWCLK: JP1.3 U1.49 | length 5.5
  Top Layer w0.254: U1.49 38.637,23.982 38.658,24.003 JP1.3
SWDIO: JP1.2 U1.46 | length 5.8
  Top Layer w0.254: U1.46 44.369,20.899 JP1.2
TX: JP9.3 U3.2 U4.22 | length 38.1
  Top Layer w0.254: U4.22 16.742,30.734 v1(26.289,30.734) ; U3.2 U3.2@48.668,28.185
  Bottom Layer w0.254: v1(26.289,30.734) 27.305,30.734 30.734,34.163 41.148,34.163 JP9.3 44.958,30.353 44.958,29.913 48.201,26.67 v1(48.641,26.67)
VDDA: C1.1 L1.2 U1.13 | length 4
  Top Layer w0.254: L1.2 27.384,13.351 C1.1 28.415,15.891 29.328,15.891 U1.13
VSSA: C1.2 L2.2 U1.12 | length 6.1
  Top Layer w0.254: L2.2 25.384,13.335 C1.2 26.908,16.383 U1.12@29.337,16.383
pads on no net: SW1.3 SW1.4 U3.9 U3.10 U3.11 U3.12 U3.13 U3.14 U3.15 U4.2 U4.4 U4.5 U4.6 U4.7 U4.9 U4.10 U4.11 U4.12 U4.13 U4.14 U4.17 U4.19 U4.20

## Polygon pours and split planes (outlines as drawn)
GND on Top Layer "GND_L01_P052" (solid, remove dead copper, pour order 52): 0,43.307 74.041,43.307 74.041,0 73.914,0 0,0
3.3V on Top Layer "3.3V_L01_P050" (solid, remove dead copper, pour order 50): 0.254,14.224 15.875,14.224 15.875,12.446 0.254,12.446
3.3V on Top Layer "3.3V_L01_P049" (solid, remove dead copper, pour order 49): 14.097,19.177 15.875,19.177 15.875,7.62 14.097,7.62
5V on Top Layer "5V_L01_P017" (solid, remove dead copper, pour order 17): 61.271,32.131 61.271,42.164 63.346,42.164 63.346,32.131
5V on Top Layer "5V_L01_P018" (solid, remove dead copper, pour order 18): 69.368,32.11 61.341,32.11 61.341,34.185 69.368,34.185
5V on Top Layer "5V_L01_P021" (solid, remove dead copper, pour order 21): 62.865,16.129 49.53,16.129 49.53,8.011 62.865,7.991
5V on Top Layer "5V_L01_P022" (solid, remove dead copper, pour order 22): 61.976,1.524 45.085,1.524 45.085,9.652 61.976,9.652
5V on Top Layer "5V_L01_P025" (solid, remove dead copper, pour order 25): 59.182,9.652 69.596,9.652 69.596,1.524 59.182,1.524
5V on Top Layer "5V_L01_P026" (solid, remove dead copper, pour order 26): 67.31,4.953 67.31,9.779 69.596,9.779 69.596,4.953
5V on Top Layer "5V_L01_P039" (solid, remove dead copper, pour order 39): 18.415,37.973 20.574,37.973 20.574,36.322 18.415,36.322
5V on Top Layer "5V_L01_P040" (solid, remove dead copper, pour order 40): 27.94,37.91 30.099,37.91 30.099,36.259 27.94,36.259
5V on Top Layer "5V_L01_P041" (solid, remove dead copper, pour order 41): 36.703,36.259 34.544,36.259 34.544,37.91 36.703,37.91
5V on Top Layer "5V_L01_P043" (solid, remove dead copper, pour order 43): 67.367,16.764 67.367,25.654 73.66,25.654 73.66,16.764
3.3V on Top Layer "3.3V_L01_P019" (solid, remove dead copper, pour order 19): 53.975,10.287 41.148,10.287 41.148,13.716 53.975,13.716
3.3V on Top Layer "3.3V_L01_P031" (solid, remove dead copper, pour order 31): 38.354,13.716 41.529,13.716 41.529,0.762 38.354,0.762
5V on Top Layer "5V_L01_P029" (solid, remove dead copper, pour order 29): 43.942,30.226 43.942,38.354 48.281,38.354 48.281,30.226
5V on Top Layer "5V_L01_P024" (solid, remove dead copper, pour order 24): 67.31,10.033 73.66,10.033 73.66,7.815 67.31,7.815
3.3V on Top Layer "3.3V_L01_P006" (solid, remove dead copper, pour order 6): 26.289,12.065 28.829,12.065 28.829,6.731 26.289,6.731
GND on Bottom Layer "GND_L02_P051" (solid, remove dead copper, pour order 51): 0,43.307 0.127,43.307 74.041,43.307 74.041,0.127 0,0
5V on Bottom Layer "5V_L02_P038" (solid, remove dead copper, pour order 38): 35.179,42.926 64.135,42.926 64.262,43.053 64.262,36.322 35.179,36.322
3.3V on Bottom Layer "3.3V_L02_P047" (solid, remove dead copper, pour order 47): 27.352,13.467 33.528,13.467 33.528,7.752 27.352,7.752
3.3V on Bottom Layer "3.3V_L02_P046" (solid, remove dead copper, pour order 46): 27.352,15.245 36.195,15.245 36.195,7.239 27.352,7.239
3.3V on Bottom Layer "3.3V_L02_P007" (solid, remove dead copper, pour order 7): 32.305,19.436 38.481,19.436 38.481,13.721 32.305,13.721
5V on Bottom Layer "5V_L02_P042" (solid, remove dead copper, pour order 42): 65.786,7.747 65.786,34.163 73.787,34.163 73.787,7.747
5V on Bottom Layer "5V_L02_P037" (solid, remove dead copper, pour order 37): 19.177,42.926 29.464,42.926 29.464,36.322 19.177,36.322 19.113,36.386 19.113,42.99
5V on Bottom Layer "5V_L02_P036" (solid, remove dead copper, pour order 36): 17.78,42.926 36.703,42.926 36.703,36.322 17.78,36.322
no net on Bottom Layer "NONET_L02_P035" (solid, remove dead copper, pour order 35): 19.05,43.053 19.177,42.926 29.464,42.926 29.464,36.322 19.05,36.322
3.3V on Bottom Layer "3.3V_L02_P034" (solid, remove dead copper, pour order 34): 39.975,21.59 30.831,21.59 30.831,29.611 39.975,29.611
3.3V on Bottom Layer "3.3V_L02_P028" (solid, remove dead copper, pour order 28): 27.241,33.909 34.48,33.909 34.48,24.511 27.241,24.511
3.3V on Bottom Layer "3.3V_L02_P027" (solid, remove dead copper, pour order 27): 37.973,24.384 48.26,24.384 48.26,10.287 37.973,10.287
3.3V on Bottom Layer "3.3V_L02_P009" (solid, remove dead copper, pour order 9): 22.098,33.909 27.686,33.909 27.686,23.114 22.098,23.114
3.3V on Bottom Layer "3.3V_L02_P008" (solid, remove dead copper, pour order 8): 26.797,28.067 31.369,28.067 31.369,18.796 26.797,18.796

## Keep-outs
Keep-Out Layer:
  circle w0.254: c2.667,2.667 r1.75
  circle w0.254: c71.374,2.794 r1.75
  circle w0.254: c71.374,40.132 r1.75
  circle w0.254: c2.667,40.386 r1.75

## Silkscreen, mask and mechanical layers (free items; w line width, h text height)
Top Overlay:
  text "PB7" at 22.047,42.113 h0.25
  text "PB6" at 26.873,42.113 h0.25
  text "PB3" at 37.033,42.113 h0.25
  text "PA15" at 41.859,42.113 h0.25
  text "VCC" at 31.115,41.148 h0.25
  text "GND" at 15.875,41.021 h0.25
  text "GND" at 45.847,41.021 h0.25
  text "GND" at 64.897,39.878 h0.25
  text "GND" at 52.578,39.751 h0.25
  text "GND" at 71.755,36.957 h0.25 r270
  text "RX" at 43.053,33.274 h0.25
  text "VCC" at 24.892,33.147 h0.25 r270
  text "PA9" at 72.974,31.928 h0.25 r270
  text "GND" at 19.177,30.607 h0.25 r90
  text "A" at 66.663,29.693 h0.25
  text "PA8" at 72.974,26.975 h0.25 r270
  text "B" at 66.663,26.899 h0.25
  text "TX" at 42.799,26.67 h0.25
  text "VCC" at 72.517,23.241 h0.25 r270
  text "GND" at 39.497,22.479 h0.25 r45
  text "CLK" at 41.529,21.336 h0.25 r45
  text "GND" at 71.12,21.209 h0.25 r270
  text "DIO" at 43.307,19.304 h0.25 r45
  text "3.3V" at 44.323,16.51 h0.25 r45
  text "PC7" at 73.101,16.18 h0.25 r270
  text "A" at 66.663,14.101 h0.25
  text "PC6" at 73.101,11.227 h0.25 r270
  text "VCC" at 72.39,7.366 h0.25 r270
  text "5V" at 53.086,4.191 h0.25
  text "GND" at 52.959,1.397 h0.25
Bottom Overlay:
  text "5V" at 59.207,3.785 h0.25
Mechanical 1:
  circle w0.254: c2.667,40.386 r1.75
  circle w0.254: c2.667,2.667 r1.75
  circle w0.254: c71.374,2.794 r1.75
  circle w0.254: c71.374,40.132 r1.75
  lines w0.254: 73.848,0.043 73.848,43.096 ; 74.041,0.127 0.127,0.127 0.127,43.18 74.041,43.18
Mechanical 15:
  lines w0.254: 60.268,39.174 60.318,39.224